# Allegro board ESP20_C_V110.brd
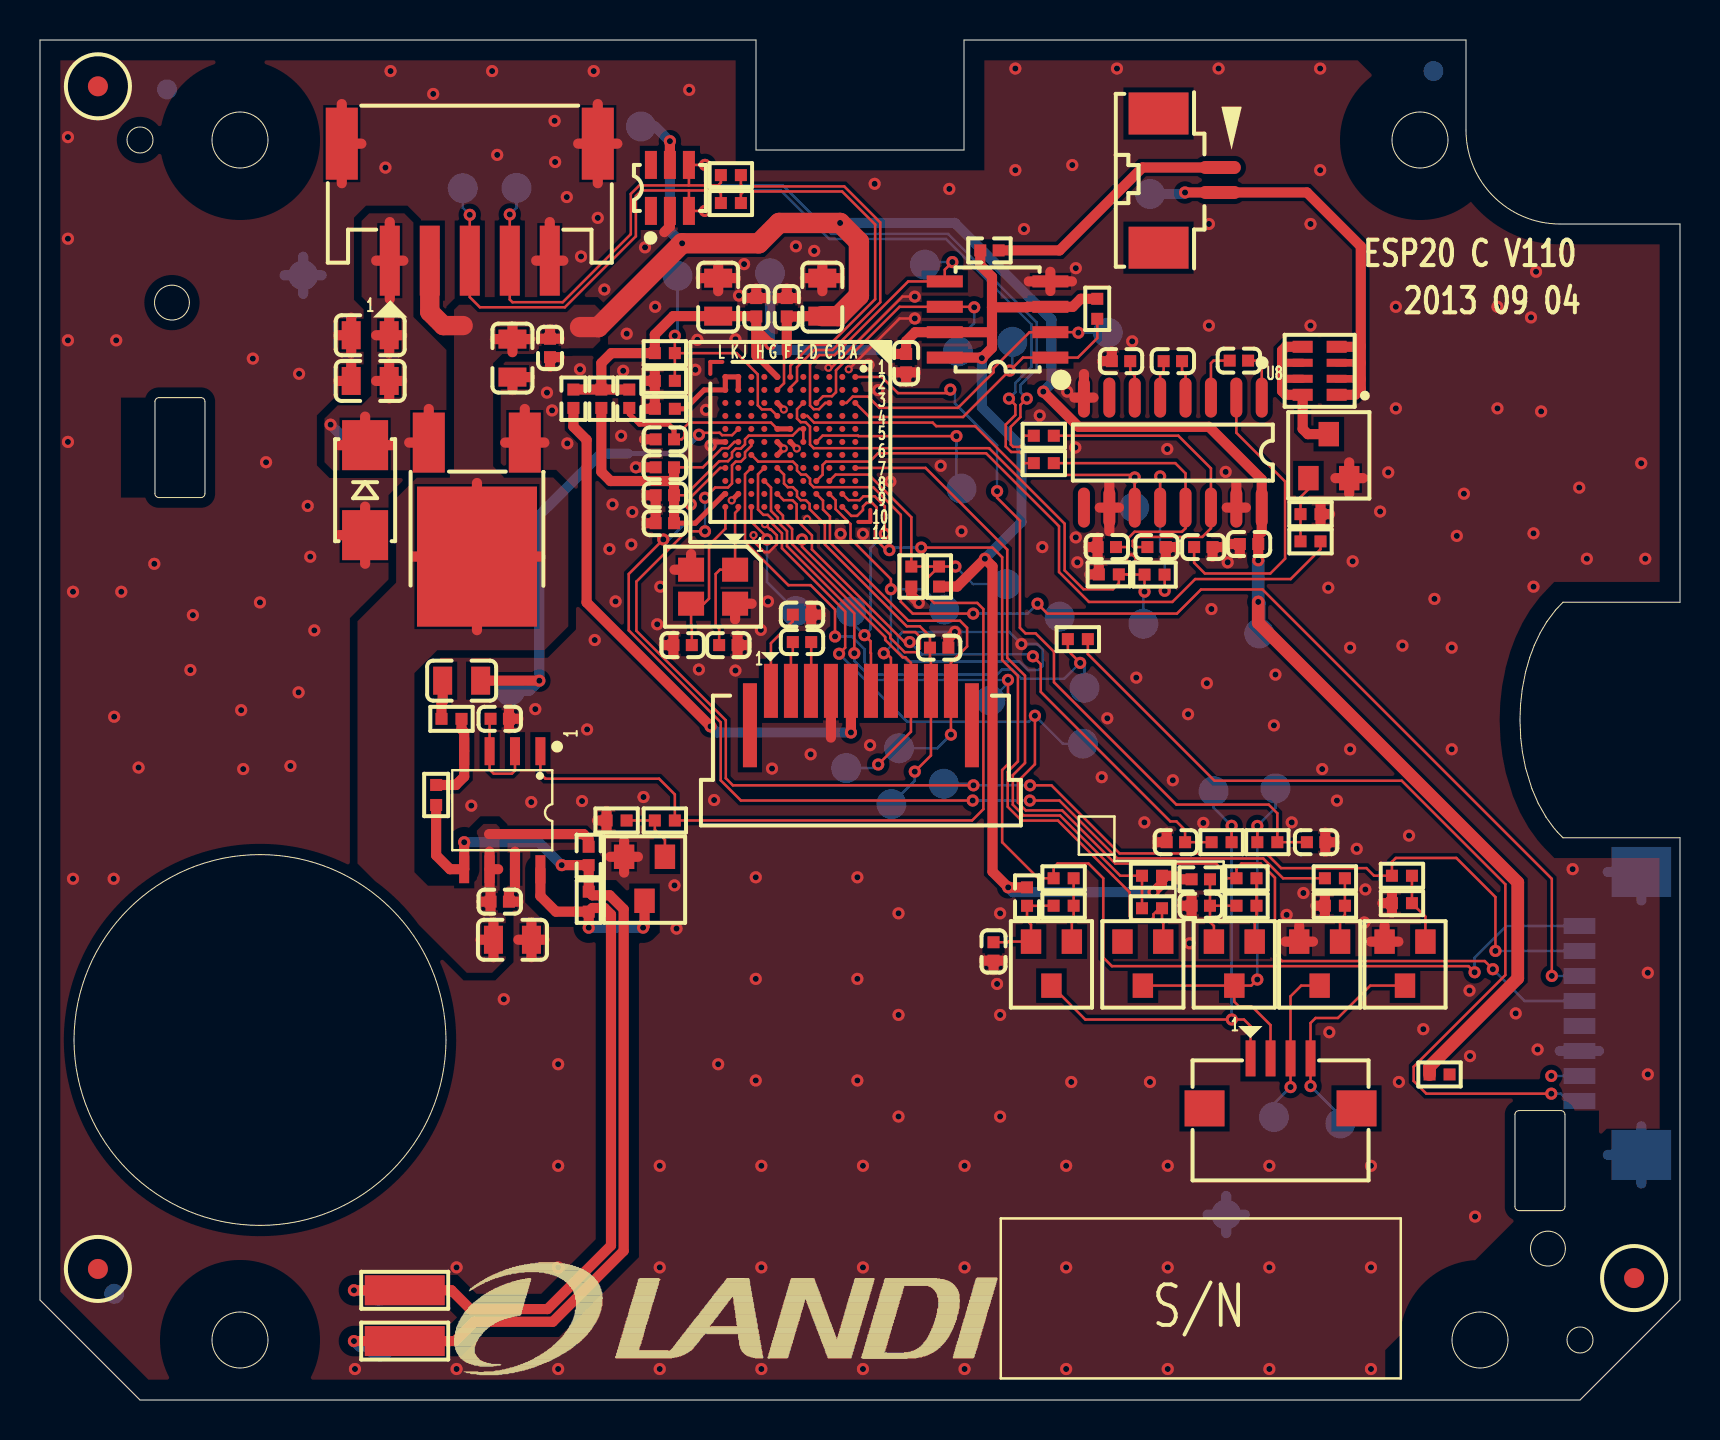
[diagram p0: board, top side]
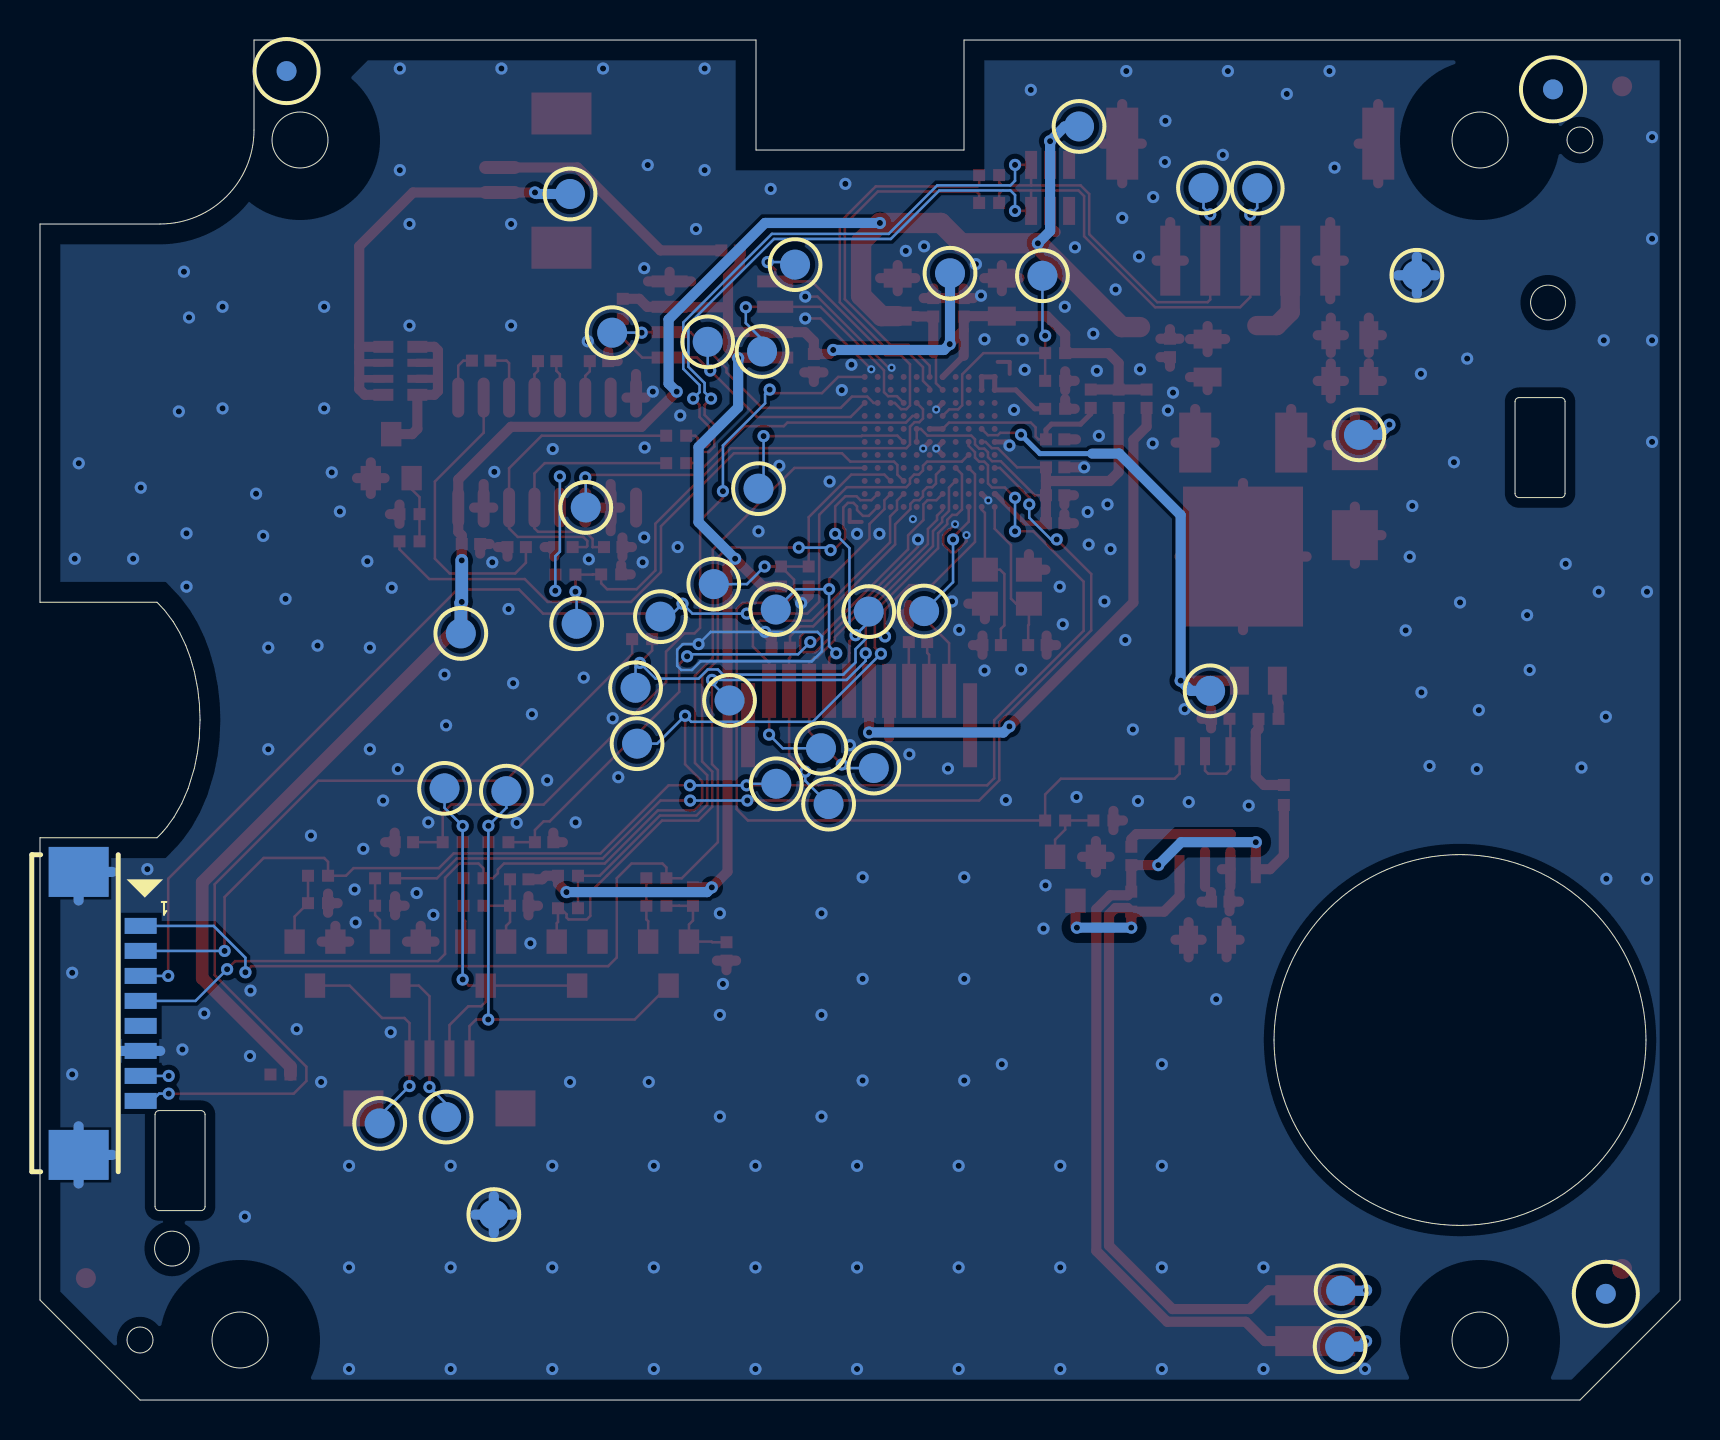
[diagram p1: board, bottom side, seen from below]

Outline 82 x 68 mm; copper layers: TOP, BOTTOM. Coordinates in mm from the lower left corner of the outline.
Outline path: circle c5,63 r0.65 ; circle c6.6,54.87 r0.87 ; circle c10,63 r1.4 ; circle c10,3 r1.4 ; circle c69,63 r1.4 ; circle c72,3 r1.4 ; circle c75.4,7.57 r0.87 ; circle c77,3 r0.65 ; 0,68 35.8,68 35.8,62.5 46.2,62.5 46.2,68 71.3,68 71.3,63.5 arc(72.68,60.18) 76,58.8 82,58.8 82,39.89 76.15,39.89 75.77,39.49 75.34,38.92 75.02,38.37 74.71,37.73 74.49,37.13 74.28,36.41 74.11,35.55 74.03,34.77 74,34 74.04,33.09 74.12,32.38 74.28,31.6 74.59,30.57 74.91,29.83 75.3,29.15 75.67,28.64 75.87,28.4 76.15,28.11 82,28.11 82,5 77,0 5,0 0,5 0,68 ; 1.7,18 arc(11,27.3) 20.3,18 arc(11,8.7) 1.7,18 ; 5.75,49.92 5.75,45.32 arc(5.81,45.18) 5.95,45.12 8.05,45.12 arc(8.19,45.18) 8.25,45.32 8.25,49.92 arc(8.19,50.06) 8.05,50.12 5.95,50.12 arc(5.81,50.06) 5.75,49.92 ; 73.75,14.27 arc(73.81,14.41) 73.95,14.47 76.05,14.47 arc(76.19,14.41) 76.25,14.27 76.25,9.67 arc(76.19,9.53) 76.05,9.47 73.95,9.47 arc(73.81,9.53) 73.75,9.67 73.75,14.27

## Design rules (mm)
net group D: nets D+ D-
net group DIFFPAIR0: nets D+&RXD D-&TXD
net group DIFFPAIR1: nets AUDIO_N AUDIO_P
nets with their own width: min track width 0.254; nets A3.3V LCD_BL_TEST N17068982 N17583782
nets with their own width: min track width 0.508; nets GND VOUT33
nets with their own width: min track width 1.016; nets 5.0V

## Placement (name value [footprint] x y rotation side)
C1  104  [C0402]  31.24 46.63 180 top
C2  104  [C0402]  31.24 45.24 180 top
C3  104  [C0402]  31.24 43.84 180 top
C4  104  [C0402]  35.81 54.64 90 top
C6  22pF  [C0402]  32.13 37.74 180 top
C7  22pF  [C0402]  34.42 37.74 0 top
C8  104  [C0402]  31.24 48.03 180 top
C10  104  [C0402]  43.31 51.84 90 top
C11  104  [C0402]  47.68 22.43 90 top
C12  104  [C0402]  63.8 27.89 0 top
C13  104  [C0402]  58.04 24.71 0 top
C14  104  [C0402]  56.79 27.89 180 top
C15  105  [C0402]  38.1 39.27 0 top
C16  105  [C0402]  38.1 37.9 180 top
C17  220pF  [C0402]  44.96 37.62 0 top
C18  104  [C0402]  22.99 24.92 0 top
C19  10uF/10V  [C0805]  23.62 23.01 0 top
C20  474  [C0805]  21.08 35.97 180 top
C21  105  [C0402]  22.99 34.06 180 top
C22  10uF/16V  [C0805]  16.51 50.95 180 top
C23  10uF/16V  [C0805]  16.51 53.24 180 top
C24  10uF/10V  [C0805]  23.62 52.1 270 top
C25  104  [C0402]  25.5 52.6 270 top
C29  104  [C0402]  37.34 54.64 90 top
C30  104  [C0402]  59.94 51.97 0 top
C31  104  [C0402]  60.45 42.8 180 top
C32  104  [C0402]  56.64 51.94 180 top
C33  104  [C0402]  58.17 42.65 0 top
C34  104  [C0402]  54.05 51.94 180 top
C35  100pF  [C0402]  55.83 42.65 0 top
C36  100pF  [C0402]  53.34 42.65 180 top
C37  10uF/10V  [C0805]  33.91 55.14 90 top
C38  10uF/10V  [C0805]  39.12 55.14 90 top
D1  BAT54C  [SOT23-3_PH095_HE025]  55.14 21.82 180 top
D2  B140-13-F  [D_SMA_HE056_L046W029]  16.26 45.49 270 top
D3  CM1293A-04SO  [SOT23-6_PH095_HE030]  31.5 60.6 0 top
FB1  600  [L0402]  29.46 50.06 90 top
FB2  600  [L0402]  49.35 25.17 270 top
FB3  600  [L0402]  58.04 26.04 0 top
FB4  600  [L0402]  28.07 50.06 270 top
FB5  600  [L0402]  47.47 57.48 0 top
FB6  600  [L0402]  26.67 50.06 270 top
FB8  600  [L0402]  27.43 27.2 90 top
FM1  -  [FM_SHAPE_1M50X4M00]  18.24 2.95 270 top
FM2  -  [FM_SHAPE_1M50X4M00]  18.24 5.49 90 top
J1  -  [JFC_4S_100_CF25041D0R0-10]  62.03 13.98 0 top
J2  -  [JBW_2S-125_CI4402M1HR0]  56.28 60.99 270 top
J3  -  [JFC_10S-100_SFW10R1ST-LF]  41.05 32.73 0 top
J4  -  [JBWM_5S-200_A2001WR-S-05PD01]  21.49 60.79 180 top
J5  -  [JBWM_8S-125_MOLEX533980871]  78.97 19.35 270 bottom
M1  -  [MARK]  2.9 65.68 0 top
M2  -  [MARK]  2.9 6.55 0 top
M3  -  [MARK]  79.71 6.1 0 top
M4  -  [MARK]  69.67 66.45 180 bottom
M5  -  [MARK]  6.35 65.53 180 bottom
M6  -  [MARK]  3.71 5.31 180 bottom
NOREF  -  []  41.74 -1.13 0 top
NOREF#2  -  []  116.86 3.81 90 top
NOREF#3  -  []  111.86 71.81 0 top
NOREF#4  -  []  111.86 134.81 0 top
NOREF#5  -  []  359.89 71.81 90 top
NOREF#6  -  []  111.86 134.81 0 top
Q1  PMBT3906  [SOT23-3_PH095_HE025]  50.57 21.82 180 top
Q2  PMBT3906  [SOT23-3_PH095_HE025]  59.72 21.82 180 top
Q3  PMBT3904  [SOT23-3_PH095_HE025]  68.25 21.82 180 top
Q4  PMBT3904  [SOT23-3_PH095_HE025]  63.98 21.82 180 top
Q5  PMBT3904  [SOT23-3_PH095_HE025]  64.44 47.19 0 top
Q6  PMBT3904  [SOT23-3_PH095_HE025]  30.23 26.06 180 top
R1  10K  [R0402]  31.24 49.56 180 top
R4  10K  [R0402]  52.86 54.56 90 top
R5  4.7K F  [R0402]  51.18 24.71 180 top
R7  2K F  [R0402]  51.18 26.09 0 top
R9  390  [R0402]  61.37 27.89 0 top
R10  4.7K F  [R0402]  60.33 24.71 180 top
R11  2K F  [R0402]  60.33 26.09 0 top
R14  4.7K F  [R0402]  55.6 26.21 180 top
R15  27K  [R0402]  55.6 24.59 0 top
R16  390  [R0402]  59.08 27.89 180 top
R17  2K F  [R0402]  68.1 26.21 0 top
R18  4.7K F  [R0402]  68.1 24.84 0 top
R19  2K F  [R0402]  64.74 26.09 180 top
R20  4.7K F  [R0402]  64.74 24.71 180 top
R23  10K  [R0402]  63.53 42.93 180 top
R24  10K  [R0402]  63.53 44.29 0 top
R26  1.5K  [R0402]  27.44 24.92 90 top
R27  20K F  [R0402]  19.81 30.25 270 top
R28  20K F  [R0402]  20.57 34.06 0 top
R32  100  [R0402]  50.19 48.21 180 top
R33  100  [R0402]  50.19 46.84 180 top
R34  27K  [R0402]  55.73 41.27 0 top
R35  47K F  [R0402]  53.44 41.28 180 top
R36  49.9 F  [R0402]  34.54 59.85 180 top
R37  49.9 F  [R0402]  34.54 61.24 180 top
R42  4.7K F  [R0402]  31.24 52.34 0 top
R43  4.7K F  [R0402]  44.95 41.17 270 top
R44  4.7K F  [R0402]  31.24 50.96 180 top
R45  4.7K F  [R0402]  43.57 41.17 90 top
R46  10K  [R0402]  28.83 28.98 0 top
R47  10K  [R0402]  31.24 28.98 0 top
R48  0  [R0402]  69.98 16.28 0 top
R49  0  [R0402]  51.89 38.04 0 top
RR1  22OHM  [RA4_1632]  63.98 51.46 90 top
TP1  TEST POINT  [TP254]  40.56 39.42 180 bottom
TP3  TEST POINT  [TP254]  47.52 34.98 180 bottom
TP4  TEST POINT  [TP254]  45.21 39.52 180 bottom
TP5  TEST POINT  [TP254]  45.19 30.81 180 bottom
TP6  TEST POINT  [TP254]  40.31 31.6 180 bottom
TP7  TEST POINT  [TP254]  16.05 48.26 180 bottom
TP8  TEST POINT  [TP254]  50.98 39.17 180 bottom
TP9  TEST POINT  [TP254]  42.57 29.79 180 bottom
TP10  TEST POINT  [TP254]  52.15 32.82 180 bottom
TP11  TEST POINT  [TP254]  42.95 32.59 180 bottom
TP12  TEST POINT  [TP254]  36.5 56.34 180 bottom
TP13  TEST POINT  [TP254]  37.8 39.45 180 bottom
TP14  TEST POINT  [TP254]  30.05 63.68 180 bottom
TP15  TEST POINT  [TP254]  52.22 35.61 180 bottom
TP16  TEST POINT  [TP254]  55.5 60.3 180 bottom
TP17  TEST POINT  [TP254]  60.96 38.33 180 bottom
TP18  TEST POINT  [TP254]  61.77 30.58 180 bottom
TP20  TEST POINT  [TP254]  58.68 30.44 180 bottom
TP21  TEST POINT  [TP254]  65.02 13.83 180 bottom
TP22  TEST POINT  [TP254]  59.31 9.27 180 bottom
TP23  TEST POINT  [TP254]  61.7 14.15 180 bottom
TP24  TEST POINT  [TP254]  13.16 56.24 180 bottom
TP29  TEST POINT  [TP254]  55.17 38.81 180 bottom
TP30  TEST POINT  [TP254]  54.71 44.63 180 bottom
TP31  TEST POINT  [TP254]  23.83 60.6 180 bottom
TP32  TEST POINT  [TP254]  21.14 60.59 180 bottom
TP34  TEST POINT  [TP254]  16.99 2.67 0 bottom
TP35  TEST POINT  [TP254]  16.94 5.46 0 bottom
TP36  TEST POINT  [TP254]  23.5 35.46 180 bottom
TP37  TEST POINT  [TP254]  31.88 56.21 180 bottom
TP38  TEST POINT  [TP254]  48.31 40.79 180 bottom
TP39  TEST POINT  [TP254]  45.9 52.43 180 bottom
TP40  TEST POINT  [TP254]  48.62 52.91 180 bottom
TP41  TEST POINT  [TP254]  44.25 56.77 180 bottom
TP42  TEST POINT  [TP254]  53.39 53.37 180 bottom
TP43  TEST POINT  [TP254]  46.08 45.57 180 bottom
U1  K21P81M50SF4  [BGA121_PH065_1111_L80W80]  37.52 47.9 270 top
U2  W25X40BVSNIG  [SOIC8_PH127_HE062]  47.88 54.03 90 top
U4  SGM4872  [SOP8_PH127_HE063]  23.11 29.49 180 top
U5  AZ1117-ADJ  [TO_252_2]  21.84 43.57 180 top
U8  MAX232ECDR  [SOIC16_PH127_HE062]  56.64 47.37 180 top
Y1  27.12MHZ  [Y_SMCE3225]  33.66 40.67 180 top

## Library data of the parts
C1-C4 C6-C8 C10-C25 C29-C38 = C
D1 = D_BAT54C
D2 = D_SCHOTTKY
D3 = DP_CM1293A-04SO
FB1-FB6 FB8 = FB: User Part Number: 2PIN SMD
FM1 FM2 = FM_SHAPE_1M50X4M00
J1 = JFC_4S_100_CF25041D0R0-10
J2 = JBW_2S-125_CI4402M1HR0
J3 = JFC_10S-100_SFW10R1ST-LF
J4 = JBWM_5S-200_A2001WR-S-05PD01
J5 = JBWM_8S-125_MOLEX533980871
M1-M6 = MARK
Q1 Q2 = Q_PNP-BEC
Q3-Q6 = Q_NPN-BEC
R1 R4 R5 R7 R9-R11 R14-R20 R23 R24 R26-R28 R32-R37 R42-R49 = R
RR1 = RA4: User Part Number: pn; Tolerance: RichardLC
TP1 TP3-TP18 TP20-TP24 TP29-TP32 TP34-TP43 = TEST POINT
U1 = K21P81M50SF4
U2 = W25X40BVSNIG
U4 = SGM4872
U5 = AZ1117-ADJ
U8 = MAX232ECDR: Tolerance: RichardLC
Y1 = Y_CRYSTAL-SMCE

## Footprints (pads in the part's own frame, mm; a bottom-side part is the same pattern mirrored in y, then rotated)
BGA121_PH065_1111_L80W80
  round 0.3 smd: A1(-3.25,3.25) A2(-2.6,3.25) A3(-1.95,3.25) A4(-1.3,3.25) A5(-0.65,3.25) A6(0,3.25) A7(0.65,3.25) A8(1.3,3.25) A9(1.95,3.25) A10(2.6,3.25) A11(3.25,3.25) B1(-3.25,2.6) B2(-2.6,2.6) B3(-1.95,2.6) B4(-1.3,2.6) B5(-0.65,2.6) B6(0,2.6) B7(0.65,2.6) B8(1.3,2.6) B9(1.95,2.6) B10(2.6,2.6) B11(3.25,2.6) C1(-3.25,1.95) C2(-2.6,1.95) C3(-1.95,1.95) C4(-1.3,1.95) C5(-0.65,1.95) C6(0,1.95) C7(0.65,1.95) C8(1.3,1.95) C9(1.95,1.95) C10(2.6,1.95) C11(3.25,1.95) D1(-3.25,1.3) D2(-2.6,1.3) D3(-1.95,1.3) D4(-1.3,1.3) D5(-0.65,1.3) D6(0,1.3) D7(0.65,1.3) D8(1.3,1.3) D9(1.95,1.3) D10(2.6,1.3) D11(3.25,1.3) E1(-3.25,0.65) E2(-2.6,0.65) E3(-1.95,0.65) E4(-1.3,0.65) E5(-0.65,0.65) E6(0,0.65) E7(0.65,0.65) E8(1.3,0.65) E9(1.95,0.65) E10(2.6,0.65) E11(3.25,0.65) F1(-3.25,0) F2(-2.6,0) F3(-1.95,0) F4(-1.3,0) F5(-0.65,0) F6(0,0) F7(0.65,0) F8(1.3,0) F9(1.95,0) F10(2.6,0) F11(3.25,0) G1(-3.25,-0.65) G2(-2.6,-0.65) G3(-1.95,-0.65) G4(-1.3,-0.65) G5(-0.65,-0.65) G6(0,-0.65) G7(0.65,-0.65) G8(1.3,-0.65) G9(1.95,-0.65) G10(2.6,-0.65) G11(3.25,-0.65) H1(-3.25,-1.3) H2(-2.6,-1.3) H3(-1.95,-1.3) H4(-1.3,-1.3) H5(-0.65,-1.3) H6(0,-1.3) H7(0.65,-1.3) H8(1.3,-1.3) H9(1.95,-1.3) H10(2.6,-1.3) H11(3.25,-1.3) J1(-3.25,-1.95) J2(-2.6,-1.95) J3(-1.95,-1.95) J4(-1.3,-1.95) J5(-0.65,-1.95) J6(0,-1.95) J7(0.65,-1.95) J8(1.3,-1.95) J9(1.95,-1.95) J10(2.6,-1.95) J11(3.25,-1.95) K1(-3.25,-2.6) K2(-2.6,-2.6) K3(-1.95,-2.6) K4(-1.3,-2.6) K5(-0.65,-2.6) K6(0,-2.6) K7(0.65,-2.6) K8(1.3,-2.6) K9(1.95,-2.6) K10(2.6,-2.6) K11(3.25,-2.6) L1(-3.25,-3.25) L2(-2.6,-3.25) L3(-1.95,-3.25) L4(-1.3,-3.25) L5(-0.65,-3.25) L6(0,-3.25) L7(0.65,-3.25) L8(1.3,-3.25) L9(1.95,-3.25) L10(2.6,-3.25) L11(3.25,-3.25)
C0402
  rect 0.6x0.6 smd: 1(-0.46,0) 2(0.46,0)
C0805
  rect 0.95x1.4 smd: 1(-0.95,0) 2(0.95,0)
D_SMA_HE056_L046W029
  rect 2.5x2.3 smd: 1(-2.25,0) 2(2.25,0)
FM_SHAPE_1M50X4M00
  rect 1.5x4 smd: 1(0,0)
JBW_2S-125_CI4402M1HR0
  oval 0.65x2.1 smd: 1(-0.64,2.715) 2(0.61,2.715)
  rect 2.1x3 smd: 3(-3.34,-0.351) 4(3.371,-0.351)
JBWM_5S-200_A2001WR-S-05PD01
  rect 1x3.5 smd: 1(4,3.825) 2(2,3.825) 3(0,3.825) 4(-2,3.825) 5(-4,3.825)
  rect 1.6x3.6 smd: 6(-6.4,-2.025) 7(6.4,-2.025)
JBWM_8S-125_MOLEX533980871
  rect 0.8x1.6 smd: 1(-4.35,2) 2(-3.1,2) 3(-1.85,2) 4(-0.6,2) 5(0.65,2) 6(1.9,2) 7(3.15,2) 8(4.4,2)
  rect 2.5x3 smd: 9(7.1,-1.1) 10(-7.05,-1.1)
JFC_4S_100_CF25041D0R0-10
  rect 0.5x1.8 smd: 1(-1.5,3.1) 2(-0.5,3.1) 3(0.5,3.1) 4(1.5,3.1)
  rect 2x1.8 smd: 5(-3.8,0.6) 6(3.8,0.6)
JFC_10S-100_SFW10R1ST-LF
  rect 0.7x2.7 smd: 1(-4.5,2.73) 2(-3.5,2.73) 3(-2.5,2.73) 4(-1.5,2.73) 5(-0.5,2.73) 6(0.5,2.73) 7(1.5,2.73) 8(2.5,2.73) 9(3.5,2.73) 10(4.5,2.73)
  rect 0.7x4.2 smd: 11(-5.55,1.01) 12(5.55,1.01)
L0402
  rect 0.6x0.6 smd: 1(-0.46,0) 2(0.46,0)
MARK
  round 1 smd: 1(0,0)
R0402
  rect 0.6x0.6 smd: 1(-0.5,0) 2(0.5,0)
RA4_1632
  rect 0.6x1 smd: 1(-1.2,-0.85) 4(1.2,-0.85) 5(1.2,0.85) 8(-1.2,0.85)
  rect 0.4x1 smd: 2(-0.4,-0.85) 3(0.4,-0.85) 6(0.4,0.85) 7(-0.4,0.85)
SOIC8_PH127_HE062
  rect 0.6x1.8 smd: 1(-1.905,-2.64) 2(-0.635,-2.64) 3(0.635,-2.64) 4(1.905,-2.64) 5(1.905,2.64) 6(0.635,2.64) 7(-0.635,2.64) 8(-1.905,2.64)
SOIC16_PH127_HE062
  oval 0.6x2 smd: 1(-4.445,-2.75) 2(-3.175,-2.75) 3(-1.905,-2.75) 4(-0.635,-2.75) 5(0.635,-2.75) 6(1.905,-2.75) 7(3.175,-2.75) 8(4.445,-2.75) 9(4.445,2.75) 10(3.175,2.75) 11(1.905,2.75) 12(0.635,2.75) 13(-0.635,2.75) 14(-1.905,2.75) 15(-3.175,2.75) 16(-4.445,2.75)
SOP8_PH127_HE063
  rect 0.5x1.4 smd: 1(-1.905,-2.95) 2(-0.635,-2.95) 3(0.635,-2.95) 4(1.905,-2.95) 5(1.905,2.95) 6(0.635,2.95) 7(-0.635,2.95) 8(-1.905,2.95)
SOT23-3_PH095_HE025
  rect 1.02x1.22 smd: 1(-1.02,-1.1) 2(1.02,-1.1) 3(0,1.1)
SOT23-6_PH095_HE030
  rect 0.6x1.4 smd: 1(-0.95,-1.15) 2(0,-1.15) 3(0.95,-1.15) 4(0.95,1.15) 5(0,1.15) 6(-0.95,1.15)
TO_252_2
  rect 1.6x3 smd: 1(-2.4,-4.3) 3(2.4,-4.3)
  rect 6x7 smd: 2(-0.01,1.4)
TP254
  round 1.5 smd: 1(0,0)
Y_SMCE3225
  rect 1.3x1.2 smd: 1(-1.1,-0.85) 2(1.1,-0.85) 3(1.1,0.85) 4(-1.1,0.85)

## Nets
5.0V: C18.1 C19.1 C24.1 C25.1 C29.1 C31.1 C38.1 D3.5(VP) FB8.2 J4.2 R48.1 TP14.1 TP17.1 U1.G2(VREGIN) U4.6(VCC) U5.2(VOUT) U8.16(VCC)
A3.3V: C8.1 FB1.1 U1.F5(VDDA) U1.G5(VREFH)
GND: C1.2 C2.2 C3.2 C4.2 C6.2 C7.2 C8.2 C10.1 C11.1 C12.2 C13.1 C14.2 C15.2 C17.2 C18.2 C19.2 C21.1 C22.2 C23.2 C24.2 C25.2 C29.2 C31.2 C33.2 C34.2 C35.2 C36.2 C37.2 C38.2 D2.2(A) D3.2(VN) J3.4 J4.5 J4.6 J4.7 J5.6 J5.9 J5.10 Q3.2(E) Q4.2(E) Q5.2(E) Q6.2(E) R1.2 R18.1 R20.2 R24.2 R35.2 R44.2 R45.1 R46.1 TP22.1 TP24.1 U1.F6(VSSA) U1.G3(VSS_1) U1.G6(VREFL) U1.G7(VSS_2) U1.K10(VSS_3) U1.L6(VSS_4) U2.4(GND) U4.7(GND) U5.1(ADJ) U8.8(R2IN) U8.10(T2IN) U8.15(GND) Y1.2 Y1.4
VDD1: C1.1 C2.1 C3.1 FB4.2 U1.E5(VDD_1) U1.E6(VDD_2) U1.K6(VBAT) U1.L10(VDD_3)
VDD2: FB5.2 J2.1
VDD3: FB6.2 J3.5
/LCD_RST: C17.1 J3.9 TP9.1 U1.G8(ADC0_SE13/PTB3/I2C0_SDA/UART0_C)
/LCD_SPI1_CS0: J3.10 TP11.1 U1.D10(PTB10/SPI1_PCS0/UART3_RX/FTM0_F)
/RESET: TP13.1 U1.J11(R\E\S\E\T\)
/RTP_INT: D1.1(C1) R15.2 U1.B11(PTB12/UART3_RTS_B/FTM1_CH0/FTM0)
/SFLASH_SPI0_CS1: R4.1 TP40.1 U1.A3(ADC0_SE21/PTD4/LLWU_P14/SPI0_PC) U2.1(/CS)
AUDIO_N: FM2.1 Q6.3(C) R26.1 TP35.1 U4.8(VO2)
AUDIO_P: FB8.1 FM1.1 R26.2 R27.2 TP34.1 U4.5(VO1)
D+: R36.1 U1.F1(USB0_DP)
D+&RXD: D3.3(CH2) J4.3 R33.2 R36.2 TP32.1
D-: R37.1 U1.F2(USB0_DM)
D-&TXD: D3.4(CH3) J4.4 R32.2 R37.2 TP31.1
DA_SOUND: C20.1 TP36.1 U1.K5(DAC0_OUT/CMP1_IN3/ADC0_SE23)
EXTAL0: C6.1 U1.L11(EXTAL0/PTA18/FTM0_FLT2/FTM_CLKI) Y1.3
EZP_CS_B: R49.1 TP15.1 U1.J8(PTA4/LLWU_P3/FTM0_CH1/NMI_B/EZP)
LCD_BL: R23.1 U1.D9(PTB18/FTM2_CH0/I2S0_TX_BCLK/FTM)
LCD_BL_TEST: J2.2 RR1.1 RR1.2 RR1.3 RR1.4 TP16.1
LCD_D/C: J3.8 TP6.1 U1.G11(ADC0_SE8/PTB0/LLWU_P5/I2C0_SCL/)
LCD_SCLK: J3.7 TP4.1 U1.C10(PTB11/SPI1_SCK/UART3_TX/FTM0_FL)
LCD_SI: J3.6 TP1.1 U1.B10(PTB16/SPI1_SOUT/UART0_RX/FTM_CL)
PINPAD_POWER: C22.1 C23.1 D2.1(K) J4.1 TP7.1 U5.3(VIN)
PINPAD_RXD: C36.1 R33.1 U8.13(R1IN)
PINPAD_TXD: C35.1 R32.1 U8.14(T\1\O\U\T\)
PWM_DETECT: TP43.1 U1.D6(CMP0_IN3/PTC9/I2S0_RX_BCLK/FTM2)
RTP_MODE: R14.2 R15.1 U1.A8(PTC4/LLWU_P8/SPI0_PCS0/UART1_TX)
RTP_XL: D1.3(A) J1.2 Q2.3(C) R9.1 TP18.1
RTP_XL_ADC: C12.1 R9.2 U1.A1(ADC0_SE22/PTD7/CMT_IRO/UART0_TX)
RTP_XR: J1.4 Q3.3(C) TP21.1
RTP_YD: J1.3 Q4.3(C) TP23.1
RTP_YD_SW4: R19.2 U1.L8(PTA13/LLWU_P4/FTM1_CH1/I2S0_TX_)
RTP_YU: J1.1 Q1.3(C) R16.1 TP20.1
RTP_YU_ADC: C14.1 R16.2 U1.G10(ADC0_SE9/PTB1/I2C0_SDA/FTM1_CH1)
SPEAK_ON: R43.1 R45.2 R47.2 TP38.1 U1.C9(PTB19/FTM2_CH1/I2S0_TX_FS/FTM2_) U4.1(SHDN)
SPI0_CLK: TP39.1 U1.D3(ADC0_SE5B/PTD1/SPI0_SCK/UART2_C) U2.6(CLK)
SPI0_MISO: TP42.1 U1.B3(PTD3/SPI0_SIN/UART2_TX/I2C0_SDA) U2.2(DO(IO1))
SPI0_MOSI: TP41.1 U1.C3(PTD2/LLWU_P13/SPI0_SOUT/UART2_R) U2.5(DI(IO0))
TCLK/RTP_XR_SW2: J5.2 R17.1 TP5.1 U1.J6(PTA0/UART0_CTS_B/UART0_COL_B/FT)
TDI/RTP_XL_SW1: J5.4 R11.1 TP10.1 U1.H8(PTA1/UART0_RX/FTM0_CH6/JTAG_TDI)
TDO: J5.3 TP8.1 U1.J7(PTA2/UART0_TX/FTM0_CH7/JTAG_TDO)
TMS/RTP_YU_SW3: J5.1 R7.1 TP3.1 U1.H9(PTA3/UART0_RTS_B/FTM0_CH0/JTAG_)
UART1_RX: R34.1 R35.1 TP29.1 U1.E3(ADC0_SE11/PTE1/LLWU_P0/SPI1_SOU)
UART1_TX: TP30.1 U1.E4(ADC0_SE10/PTE0/SPI1_PCS1/UART1_) U8.11(T1IN)
USB_EN: R42.2 R44.1 TP37.1 U1.G4(PTE5/SPI1_PCS2/UART3_RX)
VOUT33: C4.1 C10.2 C37.1 FB1.2 FB2.1 FB3.1 FB4.1 FB5.1 FB6.1 R4.2 R14.1 R42.1 R43.2 TP12.1 U1.G1(VOUT33) U2.3(/WP) U2.7(/HOLD) U2.8(VCC)
XTAL0: C7.1 U1.K11(XTAL0/PTA19/FTM1_FLT0/FTM_CLKIN) Y1.1
N17037760: C21.2 U4.2(BYPASS) U4.3(+IN)
N17037772: R27.1 R28.2 U4.4(-IN)
N17037794: C20.2 R28.1
N17068982: R1.1 U1.K1(ADC0_DP0) U1.K2(ADC0_DM0) U1.L1(ADC0_DP3) U1.L2(ADC0_DM3)
N17095359: C33.1 U8.2(V+)
N17095362: C34.1 U8.6(V-)
N17095533: C30.2 U8.1(C1+)
N17095536: C30.1 U8.3(C1-)
N17095541: C32.1 U8.4(C2+)
N17095544: C32.2 U8.5(C2-)
N17421771: C13.2 FB3.2 Q2.2(E) R10.2
N17421775: Q2.1(B) R10.1 R11.2
N17421779: C11.2 FB2.2 Q1.2(E) R5.2
N17421783: Q1.1(B) R5.1 R7.2
N17421790: Q3.1(B) R17.2 R18.2
N17421796: Q4.1(B) R19.1 R20.1
N17493798: R34.2 U8.12(R\1\O\U\T\)
N17583425: C16.2 J3.2
N17583463: C16.1 J3.3
N17583505: C15.1 J3.1
N17583782: Q5.3(C) RR1.5 RR1.6 RR1.7 RR1.8
N17618572: Q6.1(B) R46.2 R47.1
N17619628: Q5.1(B) R23.2 R24.1
N17653136: J5.8 R49.2
N17653201: J5.7 R48.2

Pads without a net: D1 2; D3 1 6; J1 5 6; J2 3 4; J3 11 12; J5 5; M1 1; M2 1; M3 1; M4 1; M5 1; M6 1; U1 A2 A4 A5 A6 A7 A9 A10 A11 B1 B2 B4 B5 B6 B7 B8 B9 C1 C2 C4 C5 C6 C7 C8 C11 D1 D2 D4 D5 D7 D8 D11 E1 E2 E7 E8 E9 E10 E11 F3 F4 F7 F8 F9 F10 F11 G9 H1 H2 H3 H4 H5 H6 H7 H10 H11 J1 J2 J3 J4 J5 J9 J10 K3 K4 K7 K8 K9 L3 L4 L5 L7 L9; U8 7 9

## Via types
v1: diameter 0.61, hole 0.305, TOP to BOTTOM, 308 vias
v2: diameter 0.406, hole 0.203, TOP to BOTTOM, 9 vias

## Routing (per net, layer and track width the routed paths; a pad name or vN(x,y) marks a point on that pad's centre or on a via; arc(x,y) is an arc through that point)
5.0V: length 137.3
  TOP w0.127: 37.34,52.35 37.2,52.21 37.2,50.84 U1.G2
  TOP w0.508: v1(50.16,50.42) 51.93,48.66 58.45,48.66 61.09,46.02 U8.16 61.09,43.41 60.91,43.23 C31.1 v1(60.91,41.98) ; C24.1 23.62,53.7 ; C24.1 23.62,52.39 ; C24.1 24.5,53.05 ; C24.1 22.74,53.05 ; 22.45,28.3 27.18,28.3 27.43,28.04 FB8.2 ; U5.2 25.03,42.17 ; U5.2 18.67,42.17 ; U5.2 21.85,38.49 ; U5.2 21.85,45.85 ; C38.1 38.17,54.19 38.15,54.18 C29.1 37.34,52.35 ; C18.1 22.53,25.4 ; C18.1 22.05,24.92 ; C18.1 22.53,24.44 ; D3.5 v1(31.5,62.94) ; C25.1 25.5,53.54 ; C25.1 25.98,53.06 ; C25.1 25.02,53.06 ; 22.48,25.66 U4.6 ; U4.6 22.48,27.42 ; U4.6 22.91,26.54 ; C19.1 22.67,23.89 ; C19.1 22.02,23.01 ; C19.1 22.67,22.13
  TOP w0.635: v1(60.91,39.9) 60.91,38.86 73.89,25.88 73.89,21.08 69.48,16.67 R48.1
  TOP w0.965: 21.16,53.72 20.17,53.72 19.49,54.4 J4.2
  TOP w1.016: C38.1 39.92,54.19 40.95,55.22 40.95,57.91 v1(40.01,58.85) 36.96,58.85 35.94,57.84 v1(32.11,57.84) 27.91,53.64 27,53.64
  BOTTOM w0.508: v1(40.01,58.85) 45.75,58.85 50.57,54.03 50.57,50.83 v1(50.16,50.42) ; v1(32.11,57.84) 31.5,58.45 v1(31.5,62.94) 30.76,63.68 TP14.1
  BOTTOM w0.635: v1(60.91,41.98) v1(60.91,39.9) 60.96,39.86 TP17.1
A3.3V: length 9.9
  TOP w0.127: U1.G5 36.55,48.87 32.46,48.87 32.22,48.63 32.22,48.17 32.08,48.03 C8.1
  TOP w0.254: FB1.1 29.46,49.3 29.97,48.79 31.42,48.79 31.7,48.51 C8.1 ; U1.G5 U1.F5
GND: length 163.5
  TOP w0.127: v2(35.68,43.25) 35.68,42.94 36.22,42.39 36.45,42.39 36.84,42.79 36.84,43.23 36.55,43.52 36.51,43.52 v2(36.25,43.79) ; v2(40.44,51.54) 42.98,54.08 v1(43.74,54.08) ; v2(39.42,51.61) 39.57,51.61 43.13,55.17 v1(43.74,55.17) ; 43.2,38.39 43.77,38.39 43.99,38.17 43.99,37.57 43.81,37.39 43.23,37.39 42.51,38.11 42.51,38.25 38.1,42.67 v1(38.1,43.03)
  TOP w0.254: U1.G7 36.87,47.25 v2(37.19,47.57) 36.87,47.9 U1.G6 ; U1.F6 37.52,47.9 v2(37.84,47.57) ; U1.K10 34.91,45.3 v2(34.59,44.98) ; U1.G3 36.87,49.85 v2(37.19,49.52) ; v1(33.53,47.73) 33.71,47.9 U1.L6
  TOP w0.508: 16.26,41.81 D2.2 ; D2.2 14.93,43.24 ; D2.2 16.26,44.67 ; C1.2 v1(29.79,46.63) ; C8.2 30.2,48.03 ; C38.2 39.12,56.75 ; C38.2 38.24,56.09 ; C38.2 39.99,56.09 ; C38.2 39.12,55.44 ; 52.46,41.28 R35.2 52.94,41.76 ; 14.91,50.95 C22.2 15.56,51.83 ; U8.8 52.68,50.12 ; U8.8 52.2,51.3 ; U8.8 51.72,50.12 ; Q6.2 29.21,27.95 ; Q6.2 29.21,26.37 ; Q6.2 28.52,27.16 ; Q6.2 29.89,27.16 ; U8.15 59.82,45.8 ; U8.15 60.3,44.62 ; U8.15 59.34,44.62 ; 30.78,44.76 C2.2 30.3,45.24 ; 35.58,39.82 Y1.4 34.76,39.04 ; 23.75,25.66 23.75,27.42 ; C19.2 25.23,23.01 ; C19.2 23.92,23.01 ; C19.2 24.57,23.89 ; C19.2 24.57,22.13 ; 15.56,52.36 C23.2 ; C23.2 15.56,54.12 ; C23.2 14.91,53.24 ; U8.10 53.95,44.62 ; U8.10 53.47,43.44 ; U8.10 53.47,45.8 ; U8.10 52.99,44.62 ; C37.2 34.79,56.09 ; C37.2 33.03,56.09 ; C37.2 33.91,56.75 ; C37.2 33.91,55.44 ; 64.24,24.24 R20.2 ; R20.2 63.77,24.71 ; R20.2 64.24,25.19 ; 27.89,60.84 J4.6 ; J4.6 28.87,62.82 ; J4.6 27.89,64.8 ; J4.6 26.91,62.82 ; C17.2 45.42,38.08 v1(45.75,38.4) ; 56.77,42.65 C35.2 56.29,42.17 ; C29.2 37.34,55.57 ; C29.2 37.82,55.1 ; C29.2 36.86,55.1 ; R46.1 28.33,29.45 ; R46.1 28.33,28.5 ; R46.1 27.85,28.98 ; 65.46,45.3 Q5.2 ; Q5.2 66.15,46.09 ; Q5.2 64.77,46.09 ; Q5.2 65.46,46.88 ; 47.68,21.49 C11.1 ; C11.1 48.15,21.97 ; C11.1 47.2,21.97 ; U2.4 51.6,55.93 ; U2.4 50.52,55.45 ; U2.4 50.52,56.41 ; U2.4 49.44,55.93 ; 31.19,37.74 C6.2 ; C6.2 31.67,38.22 ; C6.2 31.67,37.27 ; C4.2 36.29,55.1 ; C4.2 35.34,55.1 ; C4.2 35.81,55.57 ; R24.2 64.5,44.29 ; R24.2 64.03,44.77 ; R24.2 64.03,43.81 ; 24.81,56.97 J4.5 ; J4.5 26.17,56.97 ; J4.5 25.49,58.9 ; 15.09,60.84 J4.7 ; J4.7 15.09,64.8 ; J4.7 16.07,62.82 ; 30.74,50.48 R44.2 ; R44.2 30.74,51.44 ; R44.2 30.26,50.96 ; 24.5,51.15 C24.2 23.62,50.49 ; 30.3,43.84 C3.2 30.78,44.32 ; 23.26,47.87 U5.1 ; U5.1 24.24,49.55 ; U5.1 25.22,47.87 ; Q4.2 62.96,23.71 ; Q4.2 63.65,22.92 ; Q4.2 62.27,22.92 ; 66.54,22.92 Q3.2 ; Q3.2 67.23,23.71 ; Q3.2 67.92,22.92 ; 53.59,52.42 C34.2 53.11,51.94 ; 32.55,42.29 Y1.2 31.73,41.52 ; 42.83,51.38 C10.1 ; C10.1 43.79,51.38 ; C10.1 43.31,50.9 ; 57.58,24.24 C13.1 ; C13.1 57.58,25.19 ; C13.1 57.1,24.71 ; 25.5,51.67 C25.2 25.98,52.14 ; J3.4 39.55,33.12 ; C21.1 23.45,34.54 ; C21.1 23.93,34.06 ; C21.1 23.45,33.58 ; 55.86,27.89 C14.2 56.33,28.37 ; 59.99,42.32 C31.2 59.51,42.8 ; 58.63,42.17 C33.2 59.1,42.65 ; 30.26,49.56 R1.2 30.74,50.04 ; 23.45,25.4 C18.2 23.93,24.92 ; C36.2 52.88,43.12 ; C36.2 52.88,42.17 ; C36.2 52.4,42.65 ; C12.2 64.26,28.37 ; C12.2 64.74,27.89 ; C12.2 64.26,27.41 ; R18.1 67.6,25.32 ; R18.1 67.6,24.36 ; R18.1 67.12,24.84 ; C15.2 38.56,39.75 ; C15.2 39.04,39.27 ; C15.2 38.56,38.79 ; R45.1 43.57,40.23 v1(43.94,39.85) ; C7.2 34.88,38.22 ; C7.2 35.36,37.74 ; C7.2 34.88,37.27 ; 31.22,58.39 31.5,58.67 D3.2
  BOTTOM w0.127: 49.86,37.8 v1(49.07,37.8) 48.46,38.4 v1(45.75,38.4) 43.13,38.4 42.9,38.18 42.9,37.44 43.41,36.93 48.97,36.93 49.4,36.5 49.94,36.5 50.14,36.7 50.14,37.52 49.86,37.8
  BOTTOM w0.508: 59.31,8.34 TP22.1 ; TP22.1 58.38,9.27 ; TP22.1 60.24,9.27 ; TP22.1 59.31,10.2 ; 12.23,56.24 TP24.1 ; TP24.1 13.16,55.31 ; TP24.1 13.16,57.16 ; TP24.1 14.09,56.24 ; J5.9 80.07,13.68 ; J5.9 80.07,10.83 ; J5.9 78.39,12.25 ; 80.07,24.98 J5.10 78.39,26.4 ; 77.95,17.45 J5.6 75.99,17.45
  vias: v1(1.4,63.14) v1(1.4,58.06) v1(1.4,52.98) v1(1.4,47.9) v1(1.65,40.41) v1(1.65,26.06) v1(3.71,34.16) v1(3.68,26.06) v1(3.81,52.98) v1(4.06,40.41) v1(4.93,31.62) v1(5.71,41.81) v1(7.52,36.5) v1(7.65,39.24) v1(10.06,34.49) v1(10.16,31.55) v1(10.64,52.07) v1(11,39.88) v1(11.3,46.89) v1(12.52,31.7) v1(12.93,35.38) v1(12.95,51.31) v1(13.39,44.7) v1(13.51,42.16) v1(13.72,38.48) v1(15.75,1.55) v1(17.27,61.62) v1(17.53,66.45) v1(19.66,65.3) v1(20.83,6.63) v1(20.83,1.55) v1(21.56,29.72) v1(22.61,66.45) v1(22.86,62.26) v1(23.19,20.04) v1(24.56,29.9) v1(24.77,34.54) v1(25.35,50.37) v1(25.6,49.48) v1(25.73,63.96) v1(25.76,61.9) v1(25.91,16.79) v1(25.91,11.71) v1(25.91,6.63) v1(25.91,1.55) v1(26.34,60.15) v1(26.37,47.83) v1(27,51.54) v1(27.05,57.18) v1(27.1,29.95) v1(27.36,33.53) v1(27.69,66.45) v1(27.74,38) v1(27.89,59.11) v1(28.22,55.52) v1(28.47,42.55) v1(28.63,44.78) v1(28.78,39.93) v1(29.06,48.21) v1(29.16,51.46) v1(29.34,53.31) v1(29.62,44.4) v1(29.57,42.77) v1(30.18,30.15) v1(30.25,57.63) v1(30.76,54.66) v1(30.86,38.79) v1(31.01,40.67) v1(30.99,11.71) v1(30.99,6.63) v1(30.99,1.55) v1(31.72,25.73) v1(31.83,23.57) v1(32.46,65.51) v1(32.77,51.51) v1(32.87,53.01) v1(32.94,36.53) v1(33.3,49.5) v1(33.71,30) v1(33.91,16.79) v1(34.77,53.04) v1(34.77,36.47) v1(34.95,55.22) v1(35.2,56.79) v1(35.79,26.14) v1(35.79,21.06) v1(35.79,15.98) v1(36.04,38.51) v1(36.07,11.71) v1(36.07,6.63) v1(36.07,1.55) v1(36.4,39.93) v1(36.6,31.57) v1(37.8,57.68) v1(38.53,32.28) v1(38.71,57.45) v1(40.03,43.31) v1(40.87,26.14) v1(40.87,21.06) v1(40.87,15.98) v1(41.15,43.31) v1(41.15,11.71) v1(41.15,6.63) v1(41.15,1.55) v1(41.43,51.77) v1(41.5,32.74) v1(41.73,60.81) v1(41.91,50.5) v1(42.52,45.92) v1(42.93,24.33) v1(42.93,19.25) v1(42.93,14.17) v1(45.03,46.71) v1(45.47,60.55) v1(46.08,43.43) v1(46.23,11.71) v1(46.23,6.63) v1(46.23,1.55) v1(47.85,20.8) v1(48.01,24.33) v1(48.01,19.25) v1(48.01,14.17) v1(48.77,66.57) v1(48.77,61.49) v1(49.2,58.55) v1(49.99,49.23) v1(50.11,42.65) v1(51.31,11.71) v1(51.31,6.63) v1(51.31,1.55) v1(51.36,50.42) v1(51.61,61.75) v1(51.56,15.9) v1(51.79,56.59) v1(51.77,47.62) v1(51.79,43.13) v1(51.87,41.88) v1(53.09,31.14) v1(53.37,34.09) v1(53.85,66.57) v1(54.61,52.93) v1(54.56,42.04) v1(54.81,36.12) v1(55.22,28.88) v1(55.5,15.9) v1(56.36,47.55) v1(56.39,11.71) v1(56.39,6.63) v1(56.39,1.55) v1(56.64,30.99) v1(57.4,34.29) v1(57.48,22.83) v1(58.17,28.85) v1(58.34,35.84) v1(58.45,58.8) v1(58.45,53.72) v1(58.57,39.55) v1(58.93,66.57) v1(59.28,46.41) v1(59.39,41.88) v1(61.47,11.71) v1(61.47,6.63) v1(61.47,1.55) v1(61.7,33.73) v1(61.77,36.27) v1(62.33,24.26) v1(62.59,28.88) v1(63.17,25.35) v1(63.53,58.8) v1(63.53,53.72) v1(64.01,66.57) v1(64.01,61.49) v1(64.11,31.55) v1(64.41,40.61) v1(64.47,18.39) v1(64.85,29.97) v1(65.51,37.62) v1(65.51,32.54) v1(65.63,41.94) v1(65.84,27.56) v1(66.22,23.88) v1(66.27,25.53) v1(66.55,11.71) v1(66.55,6.63) v1(66.55,1.55) v1(67.01,44.42) v1(67.41,46.38) v1(67.79,54.66) v1(67.79,49.58) v1(67.94,15.9) v1(68.12,37.72) v1(68.45,28.22) v1(69.16,18.54) v1(69.72,40.06) v1(70.59,37.62) v1(70.59,32.54) v1(70.84,43.21) v1(71.2,45.31) v1(71.48,20.47) v1(71.5,17.2) v1(71.75,9.17) v1(72.87,54.66) v1(72.87,49.58) v1(73.79,19.33) v1(74.55,54.13) v1(74.68,43.33) v1(74.68,40.67) v1(74.8,56.41) v1(74.88,17.53) v1(75.06,49.43) v1(76.63,26.54) v1(76.96,45.62) v1(77.34,42.06) v1(80.06,46.84) v1(80.26,42.06) v1(80.39,21.36) v1(80.39,16.28) v2(38.35,44.04)
VDD1: length 25.5
  TOP w0.127: C1.1 33.15,46.63 34.1,47.59 34.41,47.59 34.72,47.9 U1.K6 ; U1.E6 U1.E5 37.96,48.55 37.63,48.22 35.44,48.22 35.25,48.03 35.25,47.78 35.04,47.57 34.79,47.57 34.6,47.38 34.6,47.14 34.4,46.94 33.96,46.94 32.26,45.24 C2.1
  TOP w0.254: C3.1 32.77,43.84 34.23,45.3 U1.L10
  TOP w0.508: C3.1 C2.1 31.7,45.95 ; FB4.2 28.07,46.41 28.52,45.95 31.7,45.95 ; 31.7,45.95 C1.1
VDD2: length 12.8
  TOP w0.508: FB5.2 50.98,57.48 55.12,61.63 J2.1
VDD3: length 28
  TOP w0.508: FB6.2 26.67,48.67 27.33,48.01 27.33,39.88 v1(33.53,33.68) ; J3.5 v1(40.55,33.38)
  BOTTOM w0.508: v1(33.53,33.68) 33.83,33.38 v1(40.55,33.38)
/LCD_RST: length 21.5
  TOP w0.127: U1.G8 37.2,46.27 37.2,45.82 37.39,45.64 37.65,45.64 37.85,45.44 37.85,45.17 38.04,44.99 38.3,44.99 38.48,44.8 38.48,44.54 39.24,43.78 39.24,42.78 43.34,38.68 43.99,38.68 44.5,38.18 C17.1 44.5,37.13 44.55,37.08 J3.9 44.55,32.23 v1(43.74,31.42)
  BOTTOM w0.127: TP9.1 43.74,30.96 v1(43.74,31.42)
/LCD_SPI1_CS0: length 19.9
  TOP w0.127: U1.D10 39.15,44.97 39.15,44.52 39.5,44.18 39.5,42.89 43.42,38.96 46,38.96 46.35,38.61 46.35,37.68 45.55,36.87 J3.10 v1(45.55,33.27)
  BOTTOM w0.127: v1(45.55,33.27) 44.87,32.59 TP11.1
/RESET: length 6.1
  TOP w0.127: U1.J11 35.57,43.91 36.35,43.13 v1(36.35,43.03)
  BOTTOM w0.127: v1(36.35,43.03) 36.35,40.89 TP13.1
/RTP_INT: length 36.8
  TOP w0.127: v1(44.06,42.62) 47.62,42.62 48.11,42.14 48.11,37 48.9,36.21 48.9,31.93 48.39,31.42 48.39,29.66 49.08,28.97 50.9,28.97 53.65,26.22 54.48,25.38 54.48,24.21 54.66,24.03 55.58,24.03 55.67,24.13 55.67,24.29 56.1,24.71 R15.2 56.1,23.9 56.16,23.84 D1.1 ; v1(42.47,42.49) 42.32,42.49 41.74,43.07 41.74,43.52 41.83,43.61 41.83,44.63 41.61,44.86 41.33,44.86 41.15,44.68 41.15,44.5 40.85,44.21 40.56,44.21 U1.B11
  BOTTOM w0.127: v1(42.47,42.49) 42.6,42.62 v1(44.06,42.62)
/SFLASH_SPI0_CS1: length 16.5
  TOP w0.127: U1.A3 41.47,49.15 46.15,49.15 48.48,51.47 v1(48.49,51.47) 48.5,51.47 49.15,52.12 U2.1 51.89,52.12 52.86,53.09 R4.1
  BOTTOM w0.127: TP40.1 48.62,51.6 v1(48.49,51.47)
AUDIO_N: length 42.7
  TOP w0.508: v1(15.7,5.49) FM2.1 20.57,5.49 21.51,4.55 25.37,4.55 28.55,7.72 28.55,24.27 28.22,24.6 27.62,24.6 R26.1 ; v1(30.15,23.62) 30.23,23.69 Q6.3 ; U4.8 25.02,25.2 25.8,24.42 R26.1 ; R26.1 v1(27.44,23.62)
  BOTTOM w0.508: v1(27.44,23.62) v1(30.15,23.62) ; v1(15.7,5.49) 15.72,5.46 TP35.1
AUDIO_P: length 49.5
  TOP w0.508: v1(21.21,27.89) U4.5 20.5,26.54 19.81,27.23 R27.2 ; v1(26.09,26.74) FB8.1 27.44,26.74 R26.2 27.62,25.23 28.49,25.23 29.18,24.54 29.18,7.46 25.64,3.91 21.72,3.91 20.75,2.95 FM1.1 v1(15.7,2.95)
  BOTTOM w0.508: TP34.1 15.98,2.67 v1(15.7,2.95) ; v1(26.09,26.74) 24.94,27.89 v1(21.21,27.89)
D+: length 17.8
  TOP w0.127: R36.1 35.04,60.29 35.18,60.43 40.11,60.43 41.76,58.78 41.76,55.04 39.47,52.76 38.56,52.76 37.52,51.71 U1.F1
D+&RXD: length 53.1
  TOP w0.127: 32.44,60.48 32.45,60.47 D3.3 v1(33.25,59.45) ; 32.44,60.48 30.08,60.48 29.79,60.2 29.79,58.19 26.24,54.64 22,54.64 21.49,55.14 J4.3 v1(21.49,59.26) ; 32.44,60.48 33.88,60.48 34.04,60.32 R36.2 ; R33.2 49.24,46.84 49.11,46.97 49.11,47.27 48.98,47.4 48.56,47.4 48.29,47.67 48.29,48.77 48.77,49.25 48.77,49.75 v1(48.45,50.07)
  BOTTOM w0.127: v1(33.25,59.45) 33.25,60.25 33.48,60.48 37.03,60.48 39.46,58.05 45.3,58.05 49.58,53.77 49.58,51.66 48.77,50.85 48.77,50.39 v1(48.45,50.07) ; v1(21.49,59.26) 21.14,59.61 TP32.1
D-: length 19
  TOP w0.127: U1.F2 37.52,50.62 37.85,50.96 37.85,51.64 38.71,52.5 39.62,52.5 42.01,54.89 42.01,58.88 40.21,60.68 35.13,60.68 35.04,60.76 R37.1
D-&TXD: length 51
  TOP w0.127: v1(49.34,50.07) 49.02,49.75 49.02,49.15 48.54,48.66 48.54,47.78 48.66,47.66 48.98,47.66 49.11,47.78 49.11,48.09 49.24,48.21 R32.2 ; 32.44,60.73 32.45,60.74 D3.4 v1(33.25,61.75) ; 32.44,60.73 33.91,60.73 34.04,60.87 R37.2 ; 32.44,60.73 29.97,60.73 29.54,60.3 29.54,58.29 26.14,54.89 23.62,54.89 23.49,55.02 J4.4 v1(23.49,59.28)
  BOTTOM w0.127: v1(49.34,50.07) 49.02,50.39 49.02,50.75 49.83,51.56 49.83,53.88 45.41,58.31 39.56,58.31 37.14,60.73 33.48,60.73 33.25,60.96 v1(33.25,61.75) ; TP31.1 23.83,59.61 v1(23.49,59.28)
DA_SOUND: length 24.7
  TOP w0.127: U1.K5 34.6,48.24 34.11,48.24 33.99,48.36 33.05,48.36 v1(32.95,48.26)
  TOP w0.508: v1(24.97,35.97) C20.1
  BOTTOM w0.254: 29.39,47.32 32,47.32 v1(32.95,48.26)
  BOTTOM w0.508: 29.39,47.32 28.04,47.32 24.97,44.25 v1(24.97,35.97) 24.46,35.46 TP36.1
EXTAL0: length 8
  TOP w0.127: U1.L11 34.27,43.56 33.45,42.75 33.45,40.07 33.2,39.82 Y1.3 32.55,38.77 32.59,38.73 C6.1
EZP_CS_B: length 27.9
  TOP w0.127: R49.1 51.39,37.47 v1(52.01,36.86) ; v1(39.75,38.18) 39.75,39.52 38.53,40.74 37.41,40.74 35.25,42.91 35.25,46.29 U1.J8
  BOTTOM w0.127: TP15.1 52.22,36.64 v1(52.01,36.86) 51.22,36.07 49.07,36.07 48.62,36.53 48.11,36.53 47.85,36.27 41.83,36.27 41.22,36.88 41.22,37.54 40.59,38.18 v1(39.75,38.18)
LCD_BL: length 32
  TOP w0.127: U1.D9 38.82,45.95 39.13,46.27 39.13,46.75 39.3,46.92 41.48,46.92 41.9,47.34 47.31,47.34 50.95,43.69 50.95,41.4 52.45,39.9 56.62,39.9 57.76,41.05 62.53,41.05 64.03,42.54 R23.1
LCD_BL_TEST: length 23.8
  TOP w0.381: 66.04,51.87 66.03,51.86 RR1.3 ; 66.04,51.05 66.03,51.06 RR1.2
  TOP w0.508: 66.04,52.68 66.04,57.68 63.35,60.38 J2.2 v1(57.25,60.38) ; 66.04,52.68 66.04,50.55 65.75,50.26 RR1.1 ; 66.04,52.68 66.02,52.66 RR1.4
  BOTTOM w0.508: v1(57.25,60.38) 57.18,60.3 TP16.1
LCD_D/C: length 18.1
  TOP w0.127: U1.G11 36.87,44.5 37.15,44.22 37.15,44.01 37.6,43.55 37.6,42.8 42.26,38.15 42.26,38 43.13,37.13 43.27,37.13 43.55,36.86 J3.8 43.55,33.41 v1(41.91,31.78)
  BOTTOM w0.127: v1(41.91,31.78) 41.73,31.6 TP6.1
LCD_SCLK: length 14.6
  TOP w0.127: v1(42.55,40.54) 42.55,41.05 40.53,43.07 40.53,43.8 39.78,44.54 39.78,44.99 U1.C10 ; J3.7 42.55,35.46 42.55,37.11 42.32,37.34 v1(42.19,37.34)
  BOTTOM w0.127: TP4.1 44.2,40.54 v1(42.55,40.54) 42.55,37.69 v1(42.19,37.34)
LCD_SI: length 13.8
  TOP w0.127: v1(42.24,43.31) 42.24,44.68 41.73,45.19 41.17,45.19 40.98,44.99 40.43,44.99 U1.B10 ; v1(41.22,38.24) 41.53,37.94 41.53,37.36 41.55,37.35 J3.6
  BOTTOM w0.127: TP1.1 40.56,38.9 v1(41.22,38.24) 41.53,38.55 41.53,42.6 v1(42.24,43.31)
PINPAD_POWER: length 19.8
  TOP w0.508: J4.1 17.49,58.9 ; J4.1 16.81,56.97 ; J4.1 18.17,56.97 ; J4.1 17.49,55.04 ; 17.46,52.36 C23.1 ; C23.1 17.46,54.12 ; C23.1 16.81,53.24 ; C23.1 18.11,53.24 ; D2.1 16.26,49.17 ; D2.1 14.93,47.74 ; D2.1 17.58,47.74 ; 17.46,50.07 C22.1 ; C22.1 16.81,50.95 ; C22.1 18.11,50.95 ; C22.1 17.46,51.83 ; 18.46,47.87 U5.3 19.44,49.55
  BOTTOM w0.508: v1(14.53,48.77) 15.04,48.26 TP7.1
PINPAD_RXD: length 13.7
  TOP w0.127: C36.1 54.37,42.65 54.37,42.64 54.37,43.05 54.73,43.41 57.1,43.41 57.28,43.59 U8.13 57.28,46.33 56.76,46.84 R33.1
PINPAD_TXD: length 16.7
  TOP w0.127: R32.1 56.92,48.21 58.55,46.58 U8.14 58.55,43.59 58.12,43.15 54.84,43.15 54.64,42.95 54.64,42.7 54.69,42.65 C35.1
PWM_DETECT: length 9.9
  TOP w0.127: v1(45.82,48.19) 40.92,48.19 40.9,48.22 39.13,48.22 U1.D6
  BOTTOM w0.127: v1(45.82,48.19) 45.82,45.82 TP43.1
RTP_MODE: length 32.2
  TOP w0.127: R15.1 R14.2 54.01,26.21 51,29.22 49.18,29.22 48.64,29.76 48.64,31.24 49.25,31.85 49.25,36.21 48.36,37.1 48.36,42.52 44.28,46.6 U1.A8
RTP_XL: length 21.4
  TOP w0.127: Q2.3 D1.3 ; Q2.3 60.56,20.72 v1(60.87,21.02) ; Q2.3 59.72,19.91 59.94,19.68 60.59,19.68 61.53,18.75 J1.2 ; R9.1 v1(60.87,28.7)
  BOTTOM w0.127: TP18.1 61.77,29.61 v1(60.87,28.7) v1(60.87,21.02)
RTP_XL_ADC: length 39
  TOP w0.127: v1(45.52,50.52) 45.34,50.34 42.9,50.34 42.09,51.15 U1.A1 ; v1(47.85,45.44) 47.85,45.11 49,43.97 49,38.61 49.28,38.33 49.78,38.33 50.7,37.41 50.7,35.89 56.82,29.77 61.43,29.77 61.87,29.34 R9.2 C12.1
  BOTTOM w0.127: v1(45.52,50.52) 45.75,50.29 45.75,49.83 47.85,47.73 v1(47.85,45.44)
RTP_XR: length 11.1
  TOP w0.127: Q3.3 66.51,20.72 64.9,19.1 63.78,19.1 63.53,18.85 J1.4 v1(63.53,15.7)
  BOTTOM w0.127: TP21.1 65.02,14.21 v1(63.53,15.7)
RTP_YD: length 8.1
  TOP w0.127: Q4.3 63.06,20.72 62.53,20.19 J1.3 v1(62.53,15.65)
  BOTTOM w0.127: v1(62.53,15.65) 61.7,14.82 TP23.1
RTP_YD_SW4: length 52.1
  TOP w0.127: v1(46.63,29.97) 35.04,29.97 34.04,30.98 34.04,33.88 29.44,38.48 29.44,41.3 v1(31.17,43.03) ; R19.2 62.15,26.09 61.16,27.08 53.87,27.08 50.97,29.97 v1(49.49,29.97) ; U1.L8 34.01,46.6 32.54,45.14 v1(32.54,44.78)
  BOTTOM w0.127: v1(49.49,29.97) v1(46.63,29.97) ; v1(32.54,44.78) 32.54,44.12 31.45,43.03 v1(31.17,43.03)
RTP_YU: length 25
  TOP w0.127: R16.1 v1(59.58,28.71) ; J1.1 60.53,18.7 60.2,19.02 v1(59.59,19.02) 52.27,19.02 Q1.3
  BOTTOM w0.127: TP20.1 58.68,29.61 v1(59.58,28.71) 59.58,19.03 v1(59.59,19.02)
RTP_YU_ADC: length 31
  TOP w0.127: v1(43.48,37.9) 43.23,37.9 38.6,42.53 38.6,43.23 37.83,44 37.83,44.79 37.63,44.99 37.18,44.99 U1.G10 ; v1(49.64,37.19) 50.04,36.79 50.04,35.41 56.52,28.93 56.82,28.93 57.25,28.5 C14.1 R16.2
  BOTTOM w0.127: v1(49.64,37.19) 49.54,37.29 44.09,37.29 v1(43.48,37.9)
SPEAK_ON: length 52.8
  TOP w0.127: R43.1 44.3,41.02 44.3,40.26 44.7,39.85 46.86,39.85 47.17,39.55 47.17,29.54 46.6,28.98 R47.2 31.74,30.28 30.95,31.06 25.27,31.06 25.02,31.32 U4.1 ; R43.1 R45.2 43.57,44.14 41.44,46.27 39.78,46.27 U1.C9 ; R43.1 v1(45.77,41.67)
  BOTTOM w0.127: v1(45.77,41.67) 46.65,40.79 TP38.1
SPI0_CLK: length 13.1
  TOP w0.127: U1.D3 39.15,50.19 39.6,50.19 39.8,50.39 39.8,51.48 42.98,54.66 U2.6 46.69,54.66 v1(46.71,54.64)
  BOTTOM w0.127: v1(46.71,54.64) 46.71,53.85 45.9,53.04 TP39.1
SPI0_MISO: length 15.3
  TOP w0.127: U1.B3 40.32,49.85 40.64,50.17 41.4,50.17 41.97,49.61 45.9,49.61 47.68,51.38 47.68,51.59 49.48,53.39 U2.2 51.89,53.39 v1(51.92,53.37)
  BOTTOM w0.127: TP42.1 v1(51.92,53.37)
SPI0_MOSI: length 14.2
  TOP w0.127: U1.C3 39.26,49.85 38.95,49.54 38.69,49.54 38.5,49.72 38.5,51.78 38.96,52.25 39.73,52.25 43.41,55.93 U2.5 45.24,56.52 v1(45.62,56.9)
  BOTTOM w0.127: TP41.1 44.37,56.9 v1(45.62,56.9)
TCLK/RTP_XR_SW2: length 72.6
  TOP w0.127: U1.J6 35.57,47.71 35.25,47.39 35.25,47.12 35.05,46.92 34.79,46.92 34.6,46.73 34.6,45.82 34.4,45.62 33.76,45.62 v1(33.25,45.11) ; v1(46.67,30.73) 34.64,30.73 34.29,31.09 34.29,33.99 29.82,38.46 29.82,40.92 32.33,43.43 v1(33.25,43.43) ; v1(72.77,22.45) 72.77,25.15 70.82,27.1 67.79,27.1 67.6,26.91 R17.1 66.7,26.21 66.32,26.59 62.05,26.59 61.32,27.33 53.98,27.33 50.57,30.73 v1(49.5,30.73)
  BOTTOM w0.127: J5.2 v1(72.77,22.45) ; v1(49.5,30.73) v1(46.67,30.73) 46.6,30.81 TP5.1 ; v1(33.25,45.11) v1(33.25,43.43)
TDI/RTP_XL_SW1: length 65.9
  TOP w0.127: v1(39.95,37.31) 40.26,37.62 40.26,39.43 37.1,42.59 37.1,43.34 36.64,43.8 36.64,44.01 36.39,44.26 36.17,44.26 35.9,44.52 35.9,46.29 U1.H8 ; v1(49.75,34.21) 49.75,31.79 48.9,30.94 48.9,29.87 49.29,29.48 51.11,29.48 53.76,26.82 58.8,26.82 59.11,26.52 59.11,26.34 59.36,26.09 R11.1 59.82,26.58 60.07,26.82 61.04,26.82 61.75,26.11 61.75,22.3 62.1,21.95 72.24,21.95 v1(72.64,21.54)
  BOTTOM w0.127: v1(39.95,37.31) 43.36,33.91 49.44,33.91 v1(49.75,34.21) 51.14,32.82 TP10.1 ; J5.4 74.23,19.95 v1(72.64,21.54)
TDO: length 60.7
  TOP w0.127: v1(49.87,39.82) 49.87,39.81 50.37,39.32 56.85,39.32 58.05,40.53 61.13,40.53 75.59,26.06 v1(75.59,21.2) ; v1(46.66,39.32) 43.64,39.32 43.04,39.92 43.04,44.26 41.66,45.64 38.69,45.64 38.5,45.82 38.5,46.07 38.3,46.27 38.05,46.27 37.85,46.47 37.85,46.72 37.65,46.92 35.91,46.92 35.89,46.94 35.57,47.25 U1.J7
  BOTTOM w0.127: v1(46.66,39.32) 49.38,39.32 v1(49.87,39.82) 50.52,39.17 TP8.1 ; J5.3 v1(75.59,21.2)
TMS/RTP_YU_SW3: length 64.8
  TOP w0.127: v1(40.72,37.34) 40.72,39.33 37.35,42.7 37.35,43.44 36.89,43.9 36.89,44.11 36.55,44.46 36.55,45.62 U1.H9 ; v1(71.73,21.39) 71.42,21.69 53.59,21.69 53.16,22.12 53.16,26.09 52.43,26.82 50.88,26.82 50.68,26.63 R7.1 49.91,26.09 48.11,27.89 48.11,31.5 48.4,31.79 v1(48.4,36)
  BOTTOM w0.127: v1(40.72,37.34) 40.72,36.96 41.67,36 v1(48.4,36) 48.4,35.85 TP3.1 ; v1(71.73,21.39) 71.73,22.11 73.32,23.7 J5.1
UART1_RX: length 26.8
  TOP w0.127: v1(55.23,40.42) R34.1 54.37,41.27 54.36,41.28 R35.1 53.94,40.84 53.64,40.54 52.17,40.54 51.23,41.48 51.23,43.81 47.46,47.59 38.69,47.59 38.5,47.77 38.5,48.67 38.28,48.89 38.04,48.89 37.85,49.07 37.85,49.54 U1.E3
  BOTTOM w0.127: v1(55.23,40.42) 55.17,40.36 TP29.1
UART1_TX: length 20.9
  TOP w0.127: U8.11 v1(54.74,46.13) 54.61,46.25 49.2,46.25 46.76,48.69 44.81,48.69 44.63,48.87 38.7,48.87 38.37,49.2 U1.E4
  BOTTOM w0.127: v1(54.74,46.13) 54.71,46.1 TP30.1
USB_EN: length 12.6
  TOP w0.127: R42.2 34.83,52.34 35.89,51.28 35.89,49.73 36.09,49.53 36.54,49.53 U1.G4 ; R42.2 v1(31.74,53.21) ; R42.2 R44.1
  BOTTOM w0.127: TP37.1 31.88,53.35 v1(31.74,53.21)
VOUT33: length 88.9
  TOP w0.305: 35.81,52.21 U1.G1
  TOP w0.508: R4.2 52.04,55.06 51.64,54.66 U2.3 49.38,54.66 49.35,54.64 47.6,54.64 ; FB4.1 28.07,51.84 28.57,52.34 R42.1 30.74,53.27 31.66,54.19 C37.1 35.8,54.19 C4.1 35.81,53.49 ; FB4.1 FB6.1 ; FB4.1 FB1.2 ; 47.6,53.37 47.57,53.39 U2.7 43.76,53.39 43.31,52.94 C10.2 42.54,52.3 v1(42.34,52.5) ; 47.6,53.37 47.6,52.6 v1(47.09,52.1) 47.07,52.12 U2.8 ; 47.6,53.37 47.6,54.64 ; FB3.1 56.9,26.04 56.72,26.21 R14.1 56.1,25.82 v1(55.68,25.4) ; 47.6,54.64 47.6,56.16 47.01,56.75 FB5.1 ; 35.81,53.49 v1(36.51,52.79) ; 35.81,53.49 35.81,52.21 ; R43.2 45.85,40.67 v1(47.24,42.06) 47.62,41.68 47.62,26.42 v1(48.41,25.63) FB2.1
  BOTTOM w0.508: v1(42.34,52.5) 36.8,52.5 v1(36.51,52.79) 36.5,52.81 TP12.1 ; v1(47.24,42.06) 49.07,43.89 49.07,47.65 47.09,49.63 v1(47.09,52.1) ; v1(48.41,25.63) 48.65,25.4 v1(55.68,25.4)
XTAL0: length 7.9
  TOP w0.127: U1.K11 34.92,44.52 34.76,44.36 Y1.1 34,41.52 33.78,41.3 33.78,38.73 33.96,38.56 C7.1
N17037760: length 4.9
  TOP w0.127: 23.75,32.44 23.75,31.47 23.6,31.32 22.68,31.32 22.48,31.52 U4.3 22.48,34.01 C21.2
N17037772: length 4.5
  TOP w0.508: R27.1 20.79,30.75 21.21,31.17 U4.4 21.21,33.4 21.07,33.54 R28.2
N17037794: length 1.9
  TOP w0.508: R28.1 20.07,34.85 20.13,34.91 C20.2
N17068982: length 4.9
  TOP w0.254: R1.1 32.26,49.56 33.21,50.5 U1.L2 U1.L1 U1.K1 U1.K2
N17095359: length 14.9
  TOP w0.127: U8.2 59.82,48.36 62.26,45.92 62.26,42.07 61.52,41.33 58.24,41.33 57.71,41.86 C33.1
N17095362: length 1.9
  TOP w0.127: C34.1 54.51,51.43 54.74,51.21 U8.6
N17095533: length 2.4
  TOP w0.127: U8.1 61.09,51.71 60.83,51.97 C30.2
N17095536: length 2.7
  TOP w0.127: U8.3 58.55,51.84 58.67,51.97 C30.1
N17095541: length 1.9
  TOP w0.127: C32.1 57.1,51.46 57.28,51.29 U8.4
N17095544: length 1.9
  TOP w0.127: U8.5 56.01,51.29 56.18,51.46 C32.2
N17421771: length 4.5
  TOP w0.127: C13.2 58.5,23.9 58.7,23.71 Q2.2 ; C13.2 FB3.2 ; C13.2 R10.2
N17421775: length 3.2
  TOP w0.127: Q2.1 60.74,23.94 60.83,24.03 R10.1 R11.2
N17421779: length 5.1
  TOP w0.127: R5.2 50.04,24.71 50.04,24.71 FB2.2 49.35,23.97 49.55,23.77 Q1.2 48.42,22.92 48.39,22.89 C11.2
N17421783: length 3.2
  TOP w0.127: R7.2 R5.1 51.68,24.03 51.59,23.94 Q1.1
N17421790: length 3.6
  TOP w0.127: R17.2 R18.2 69.27,24.17 Q3.1
N17421796: length 3.3
  TOP w0.127: R19.1 R20.1 65.24,24.25 65,24 Q4.1
N17493798: length 8.2
  TOP w0.127: v1(56.24,40.46) 56.24,41.26 R34.2 ; U8.12 v1(56.01,46.18)
  BOTTOM w0.127: v1(56.01,46.18) 56.01,42.42 56.24,42.19 v1(56.24,40.46)
N17583425: length 2.5
  TOP w0.127: C16.2 37.64,37.36 37.55,37.26 J3.2
N17583463: length 2.4
  TOP w0.127: C16.1 38.56,35.47 J3.3
N17583505: length 4.3
  TOP w0.127: C15.1 37.64,38.94 36.55,37.84 J3.1
N17583782: length 9.5
  TOP w0.254: 62.12,51.86 62.1,51.84 ; 62.1,51.21 62.25,51.06
  TOP w0.406: 62.25,51.06 RR1.7 ; RR1.6 62.12,51.86
  TOP w0.508: RR1.5 62.29,52.66 62.1,52.48 62.1,50.44 62.29,50.26 RR1.8 63.13,48.55 63.39,48.29 Q5.3
N17618572: length 3.4
  TOP w0.127: R46.2 R47.1 30.74,28.52 31.25,28.01 Q6.1
N17619628: length 3.3
  TOP w0.127: R23.2 R24.1 63.03,45.14 63.42,45.54 Q5.1
N17653136: length 46.8
  TOP w0.127: v1(75.56,15.32) 69.32,15.32 68.68,15.95 68.68,16.66 73.27,21.25 73.27,25.79 68.09,30.96 58.72,30.96 52.39,37.3 R49.2
  BOTTOM w0.127: J5.8 76.41,14.95 76.05,15.32 v1(75.56,15.32)
N17653201: length 1.4
  BOTTOM w0.127: J5.7 v1(75.57,16.2)

## Copper pours and planes (outline as drawn; the poured copper is in the pictures)
5.0V on TOP: 20.95,54.76 27.74,54.76 28.02,54.48 28.02,52.96 27.65,52.59 26.45,52.59 26.44,52.58 24.97,52.58 24.69,52.3 23.11,52.3 22.66,51.84 22.66,46.69 23.22,46.13 25.65,46.13 26.42,45.36 26.42,38.68 25.22,37.49 19.86,37.49 18.72,36.35 18.72,26.39 19.39,25.72 21.53,25.72 21.84,26.04 21.84,28.47 22.17,28.8 22.81,28.8 22.99,28.63 22.99,24.43 23.29,24.13 23.29,22.05 22.61,21.36 21.34,21.36 15.88,26.82 15.88,38.94 17.81,40.87 17.81,45.09 19.18,46.46 20.7,46.46 20.7,54.51
GND on TOP: 80.98,57.78 80.98,40.9 75.71,40.9 75,40.15 74.5,39.49 74.12,38.85 73.78,38.13 73.52,37.45 73.29,36.64 73.11,35.7 73.01,34.85 72.98,34 73.02,33.01 73.12,32.22 73.29,31.36 73.64,30.22 74,29.37 74.44,28.6 74.87,28.01 75.12,27.71 75.72,27.1 80.98,27.1 80.98,13.56 78.33,13.56 67.26,2.49 67.26,1.02 5.42,1.02 1.02,5.42 1.02,66.98 34.78,66.98 34.78,61.48 47.22,61.48 47.22,66.98 65.88,66.98 67.49,65.38 67.56,65.46 70.28,65.46 70.28,63.5 71.96,59.46 76,57.78 ; 37 cut-outs
GND on BOTTOM: 80.98,57.78 80.98,40.9 75.71,40.9 75,40.15 74.5,39.49 74.12,38.85 73.78,38.13 73.52,37.45 73.29,36.64 73.11,35.7 73.01,34.85 72.98,34 73.02,33.01 73.12,32.22 73.29,31.36 73.64,30.22 74,29.37 74.44,28.6 74.87,28.01 75.12,27.71 75.72,27.1 80.98,27.1 80.98,5.42 76.58,1.02 5.42,1.02 1.02,5.42 1.02,66.98 34.78,66.98 34.78,61.48 47.22,61.48 47.22,66.98 65.6,66.98 67.49,65.1 70.08,65.1 70.28,64.9 70.28,63.5 71.96,59.46 76,57.78 ; 6 cut-outs
PINPAD_POWER on TOP: 16.46,59.33 18.21,59.33 18.67,58.88 18.67,54.15 20.32,52.5 20.32,46.74 20.07,46.48 14.63,46.48 14.22,46.89 14.22,49.07 14.88,49.73 16.08,49.73 16.56,50.22 16.56,54.69 16.08,55.17 16.08,58.95

## Text on the board
Ref Des/Silkscreen Top: ESP20 C V110 | 2013 09 04 | S/N
BODY_CENTER: FIGURE | SIZE | 8.0 | 12.0 | DRILL CHART: TOP to BOTTOM | ALL UNITS ARE IN MILS | PLATED | QTY | 9 | 308
